# Altium PCB Chocolate_Vending_Machine_V2.2.PcbDoc
Units mm, origin at the board's own origin, x right, y up, seen from the top; angles counter-clockwise.
Board outline 80 x 72 mm, 2 copper layers (Top Layer, Bottom Layer); 22 components, 21 nets, 125 pads, 22 vias.
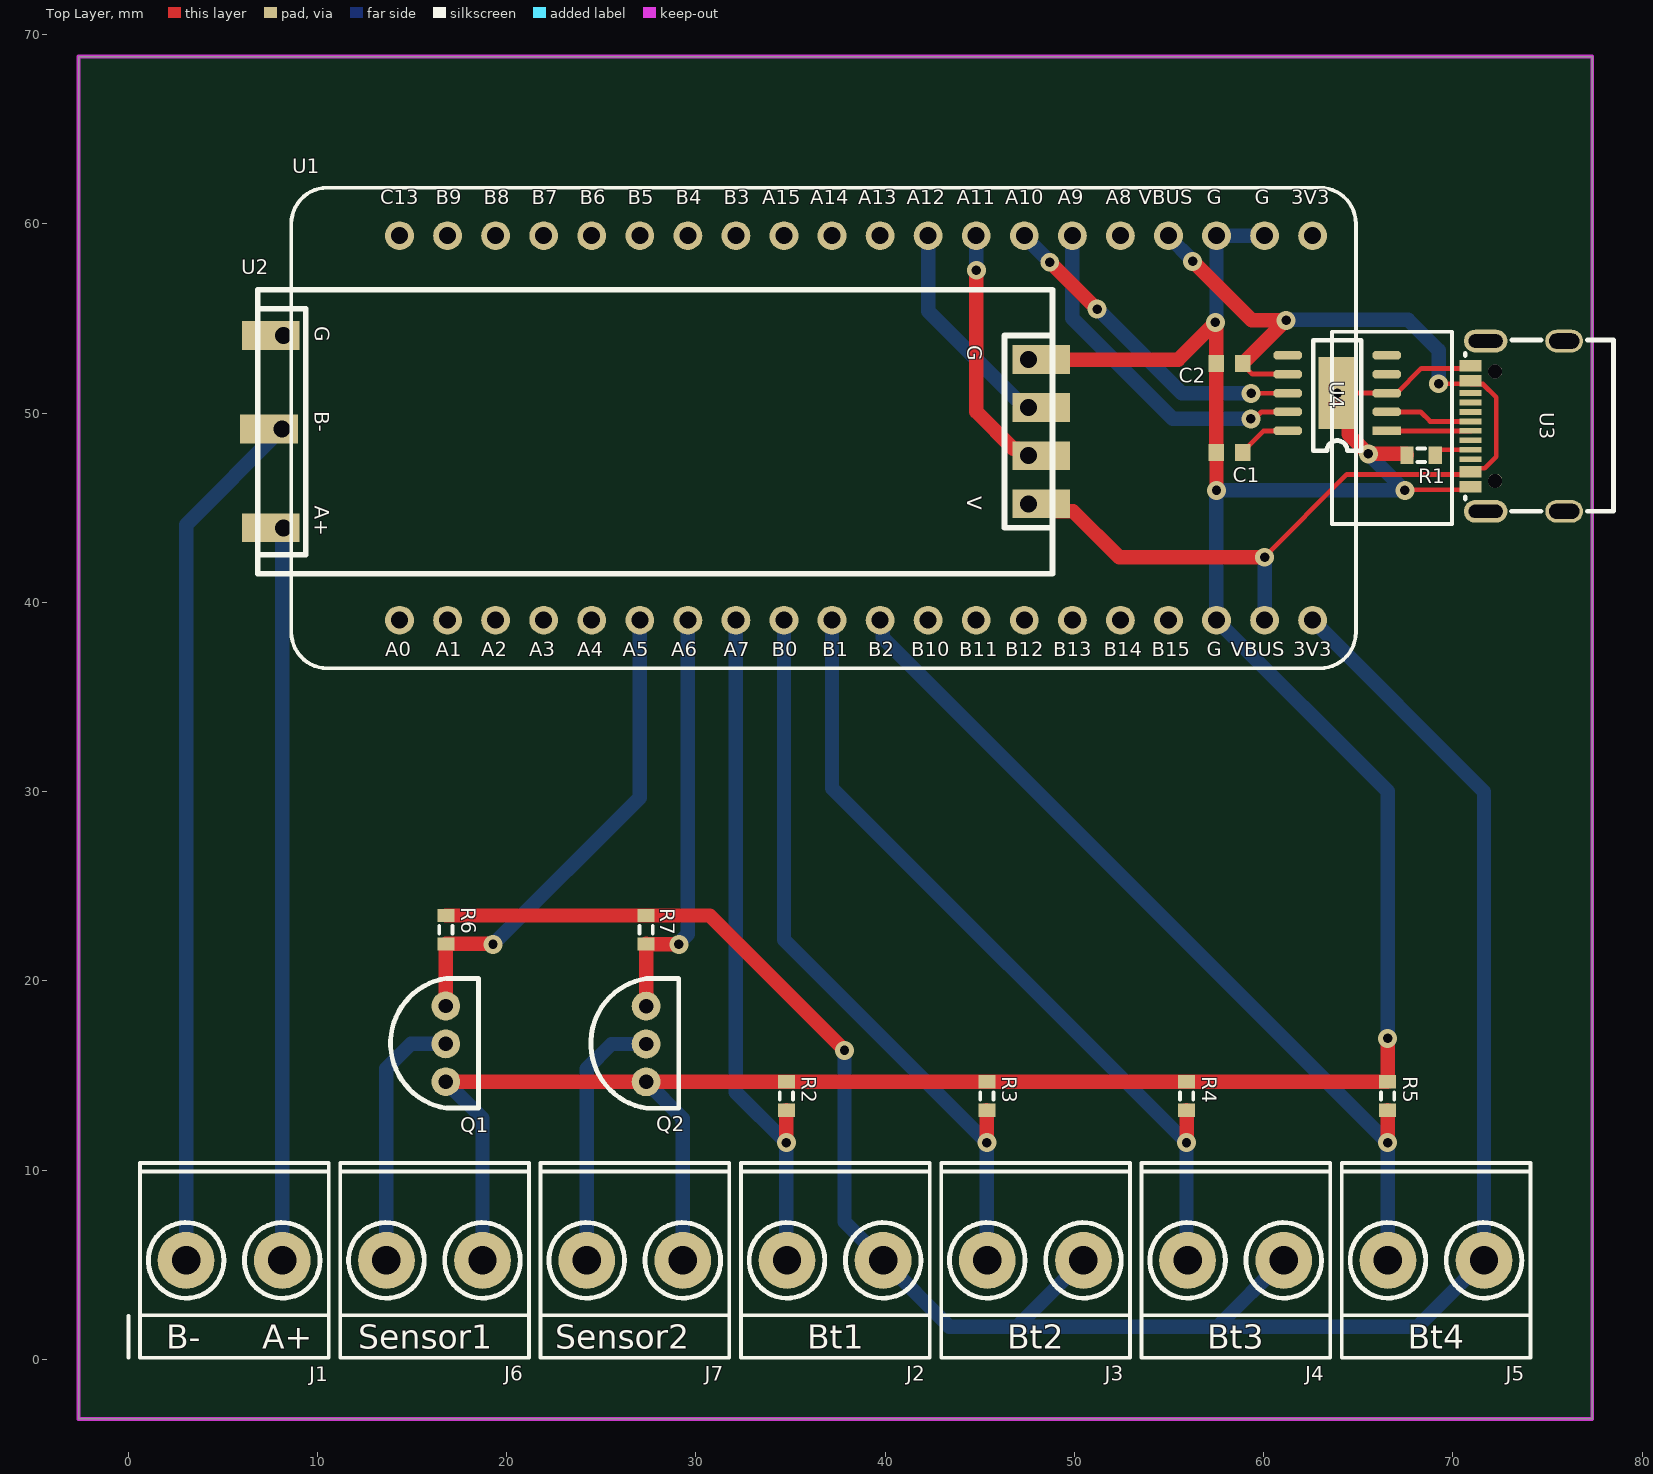
[diagram p0: Top Layer view]
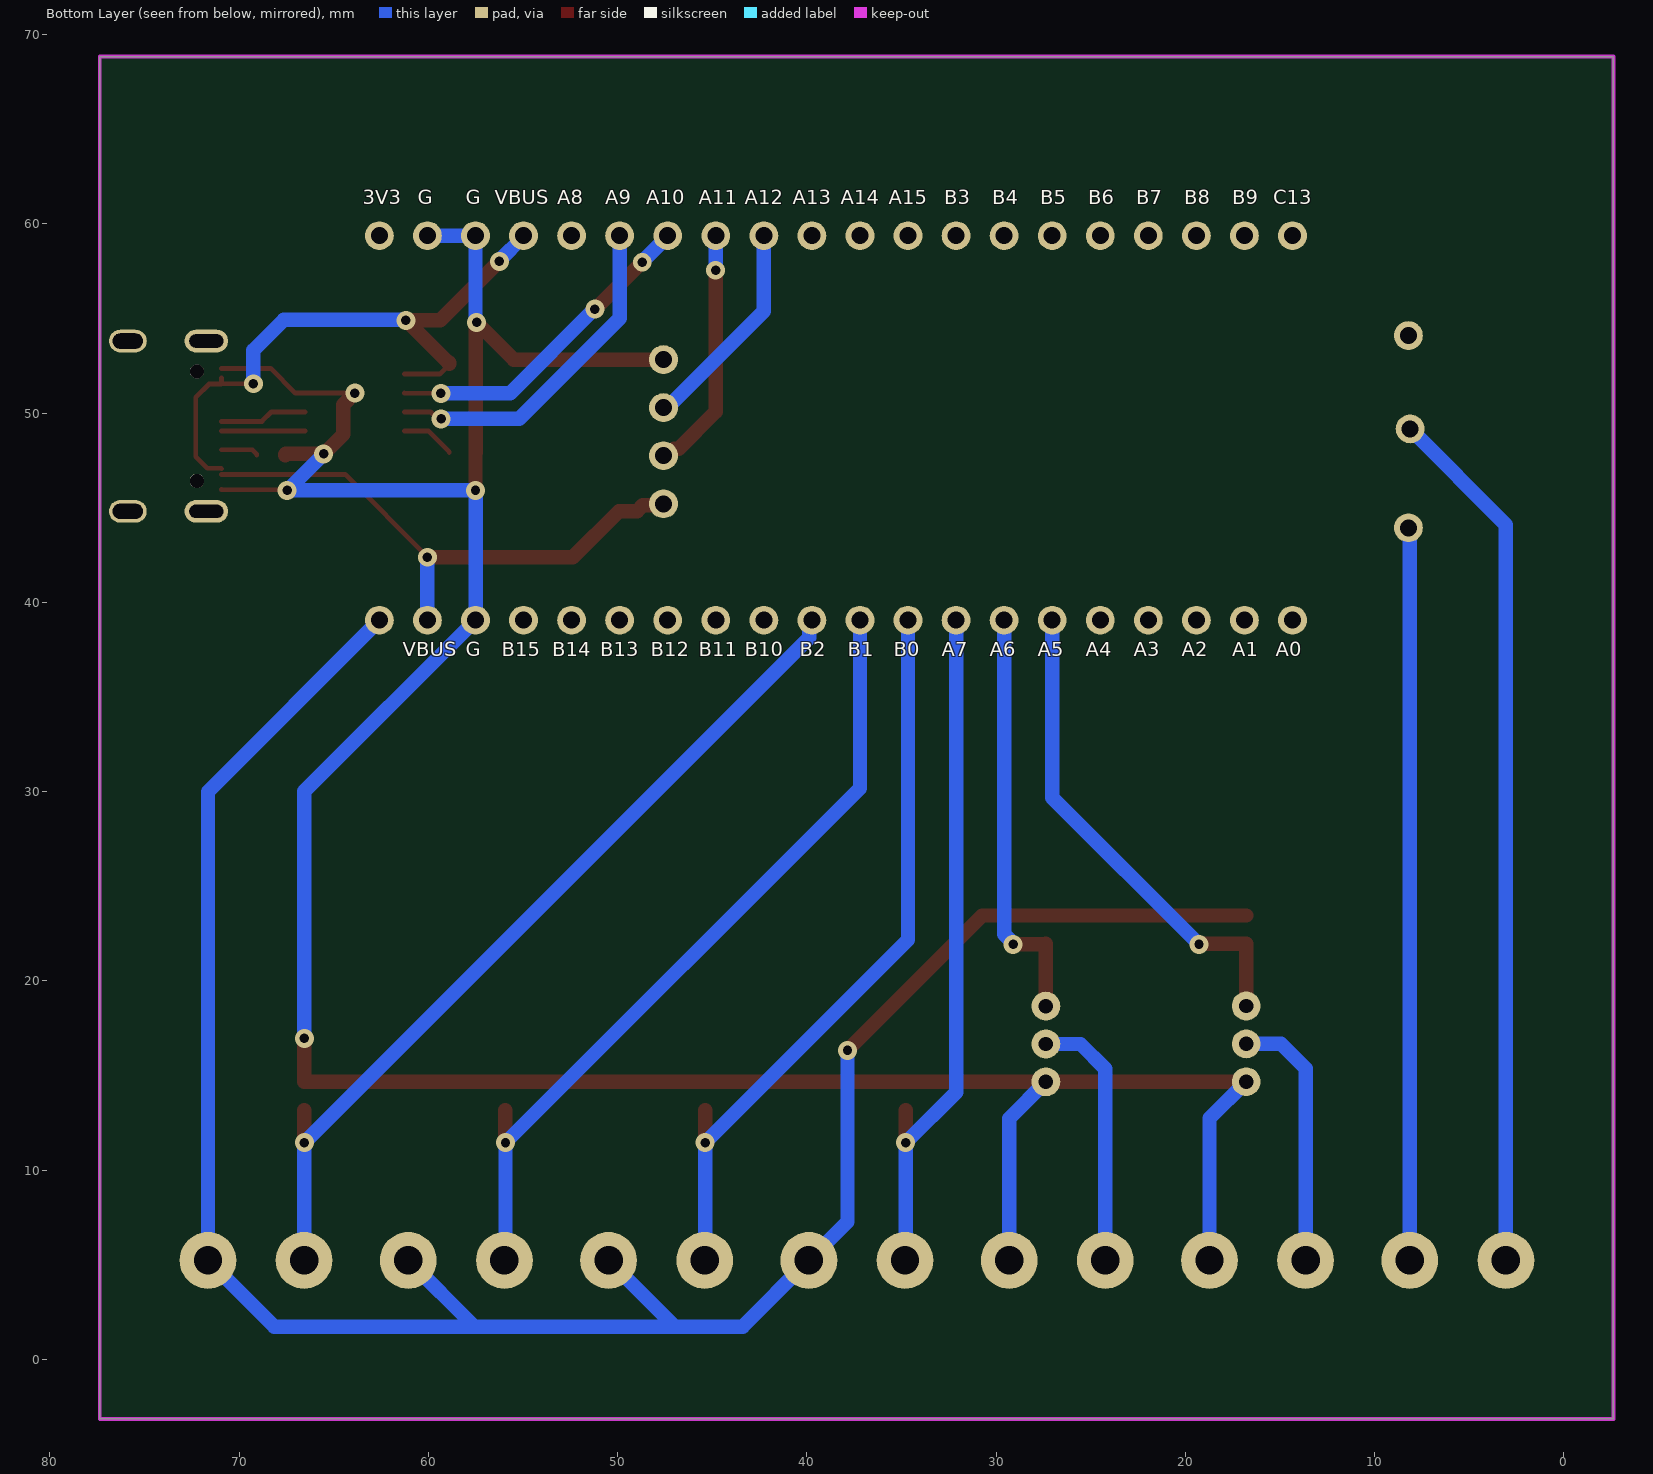
[diagram p1: Bottom Layer view, seen from below]

## Layer stack, top to bottom
Top Solder: solder mask 0.0102, Solder Resist, Dk 3.5
Top Layer: signal copper 0.0356
Dielectric 1: dielectric 0.32, FR-4, Dk 4.8
Bottom Layer: signal copper 0.0356
Bottom Solder: solder mask 0.0102, Solder Resist, Dk 3.5

## Board outline
77.375,68.841 77.375,-3.159 -2.625,-3.159 -2.625,68.841

## Design rules (kind name [scope] priority, off if disabled: settings)
Clearance [All] p1: gap=0.102 ignorepadtopadclearanceinfootprint=FALSE except(0: Arc-Hole Track-Hole SMDPad-Hole THPad-Hole Via-Hole Fill-Hole Poly-Hole Region-Hole Text-Hole)
ComponentClearance [All] p1 off: gap=0.254 collisioncheckmode=3 verticalgap=0.254 showdistances=FALSE
PolygonConnect [All] p1: connectstyle=Relief reliefconductorwidth=0.254 reliefentries=4 polygonreliefangle="90 Angle" airgapwidth=0.254
RoutingVias [All] p1: holewidth=0.5 width=1 viastyle="Through Hole" minholewidth=0.5 minwidth=1 maxholewidth=0.5 maxwidth=1
SolderMaskExpansion [All] p1: expansion=0.102 istentingtop=FALSE
Width [All] p1: maxlimit=0.762 minlimit=0.178 preferedwidth=0.254 minimp=50.000000 maximp=50.000000 favimp=50.000000
29 further rules are at their usual default settings.

## Components (designator, comment, footprint, x,y, rotation, side; value= is the part's Value field where it differs from the comment)
C1 "Cap Semi" 1608[0603] 58.2,47.914 r180 top value=0.1uF
C2 "Cap Semi" 1608[0603] 58.2,52.613 r0 top value=0.1uF
J1 "Terminal_Block" "terminal block" 3.055,5.223 r270 top
J2 "Terminal_Block" "terminal block" 34.812,5.223 r270 top
J3 "Terminal_Block" "terminal block" 45.398,5.223 r270 top
J4 "Terminal_Block" "terminal block" 55.984,5.223 r270 top
J5 "Terminal_Block" "terminal block" 66.57,5.223 r270 top
J6 "Terminal_Block" "terminal block" 13.641,5.223 r270 top
J7 "Terminal_Block" "terminal block" 24.226,5.223 r270 top
Q1 "S9013" S9013 16.782,16.67 r0 top
Q2 "S9013" S9013 27.368,16.663 r0 top
R1 "Res3" J1-0603 68.325,47.775 r0 top value=5.1K
R2 "Res3" J1-0603 34.779,13.91 r90 top value=1K
R3 "Res3" J1-0603 45.371,13.91 r90 top value=1K
R4 "Res3" J1-0603 55.937,13.91 r90 top value=1K
R5 "Res3" J1-0603 66.555,13.91 r90 top value=1K
R6 "Res3" J1-0603 16.78,22.7 r270 top value=1K
R7 "Res3" J1-0603 27.366,22.7 r270 top value=1K
U1 "STM32F411_TYPEC" STM32F411_TypeC 10.522,36.516 r0 top
U2 "UART_TO_485" UART_TO_RS485 7.008,56.531 r270 top
U3 "Type_C" Type_C_V2 74.379,49.489 r90 top
U4 "CH340K" CH340K_V1 63.889,51.061 r180 top

## Footprints (in the part's own frame and the unit in brackets; to place one, negate y for a bottom-side part, rotate by r counter-clockwise, add the part's x,y. Pads: shape width x height; smd on the part's side, far side on the other; paste and mask are expansions set on the pad)
1608[0603] [mm] "Chip Capacitor, Body 1.6x0.8mm, IPC High Density"
  rect 0.8x0.9 smd: 1(-0.7,0) 2(0.7,0)
  body extent -0.87,-0.48 0.87,0.48, height 1.3
CH340K_V1 [mm] "自己畫的"
  rect 2x3.8 smd: 0(0,0)
  rect 1.5x0.45 smd: 1(-2.616,2)
  oct 1.5x0.45 smd: 2(-2.616,1) 3(-2.616,0) 4(-2.616,-1) 5(-2.616,-2) 6(2.616,-2) 7(2.616,-1) 8(2.616,0) 9(2.616,1) 10(2.616,2)
  silkscreen extent -1.27,-2.79 1.27,3.05
J1-0603 [mm] "Chip Resistor, Body 1.6x0.8mm, IPC High Density"
  rect 0.7x0.9 smd: 1(-0.75,0) 2(0.75,0)
  silkscreen extent -0.2,-0.35 0.2,0.35, body extent -0.85,-0.48 0.85,0.48, height 0.9
S9013 [mil] "S9013_TO-92"
  round 60 hole 30: 0(-0.08,-78.87) 1(-0.08,-0.13) 2(-0.08,78.61)
  silkscreen extent -115,-134 68,136
STM32F411_TypeC [mil]
  round 60 hole 35.43: 1(2050,100) 2(1950,100) 3(1850,100) 4(1750,100) 5(1650,100) 6(1550,100) 7(1450,100) 8(1350,100) 9(1250,100) 10(1150,100) 11(1050,100) 12(950,100) 13(850,100) 14(750,100) 15(650,100) 16(550,100) 17(450,100) 18(350,100) 19(250,100) 20(150,100) 21(2050,900) 22(1950,900) 23(1850,900) 24(1750,900) 25(1650,900) 26(1550,900) 27(1450,900) 28(1350,900) 29(1250,900) 30(1150,900) 31(1050,900) 32(950,900) 33(850,900) 34(750,900) 35(650,900) 36(550,900) 37(450,900) 38(350,900) 39(250,900) 40(150,900)
  silkscreen extent -75,0 2340,1000, body extent -79,-4 2344,1004, height 50
"terminal block" [mm]
  round 3 hole 1.5 paste+0 mask+0.051: 1(0,5.08) 2(0,0)
  silkscreen extent -5.15,-2.44 5.15,7.54
Type_C_V2 [mm] "孟昌學長的"
  oval 1.2x2 hole 0.8 slot 1.6 at 90 deg: 0(-4.678,-1.506) 0(4.322,-1.506)
  oval 1.2x2.3 hole 0.7 slot 1.8 at 90 deg: 0(-4.678,2.644) 0(4.322,2.644)
  rect 0.3x1.15 smd: A1(-3.528,3.442) A4(-2.728,3.44) A5(-1.428,3.444) A6(-0.428,3.444) A7(0.072,3.442) A9(2.372,3.444) A12(3.172,3.444) B1(2.872,3.444) B4(2.072,3.444) B5(1.572,3.444) B6(0.572,3.444) B7(-0.928,3.442) B9(-2.428,3.44) B12(-3.228,3.442)
  rect 0.3x1.148 smd: A8(-1.928,3.444) B8(1.072,3.444)
  round 0.75 hole 0.75 unplated: ""(-3.068,2.144) ""(2.712,2.144)
  silkscreen extent -4.68,-4.11 4.38,3.72, body extent -4.67,-4.06 4.27,3.84, height 3.25
UART_TO_RS485 [mil]
  round 60 hole 35.43: 1(445.71,1597.13) 2(345.71,1597.13) 3(245.71,1597.13) 4(145.71,1597.13) 5(495.71,47.13) 6(289.8,43.58) 7(95.71,47.13)
  rect 60x120 smd: 1(445.71,1623.9) 2(345.71,1623.9) 3(245.71,1623.9) 4(145.71,1623.9) 5(495.71,20.35) 6(289.8,16.81) 7(95.71,20.35)
  silkscreen extent 0,-6 591,1647

## Part data
C1 C2: "Capacitor (Semiconductor SIM Model)", LatestRevisionDate=29-May-2009, LatestRevisionNote="IPC-7351 Footprint Added.", PackageDescription="Chip Capacitor", PackageReference=C1206, Published=8-Jun-2000, Publisher="Altium Limited"
J1 J2 J3 J4 J5 J6 J7: library part "Terminal Block"
R1 R2 R3 R4 R5 R6 R7: "Resistor", LatestRevisionDate=29-May-2009, LatestRevisionNote="IPC-7351 Footprint Added.", PackageDescription="Chip Resistor", PackageReference=J1-0603, Published=8-Jun-2000, Publisher="Altium Limited"

## Via types
v1: diameter 1, hole 0.5, Top Layer to Bottom Layer, 22 vias

## Nets (pads, with @x,y where several pads share a name; then routed paths per layer and width w, separated by ;. In a path a pad name is that pad's centre, name@x,y a point inside that pad or via, vN(x,y) a via of type N, cw(c..) or ccw(c..) an arc to the next point about the centre after c; other vN are vias at no path point)
3.3V: J2.1 J3.1 J4.1 J5.1 R6.1 R7.1 U1.1 | length 118.1
  Top Layer w0.762: R6.1 R7.1 30.725,23.45 v1(37.85,16.325)
  Bottom Layer w0.762: v1(37.85,16.325) 37.85,7.266 J2.1 43.391,1.725 46.98,1.725 ; J3.1 46.98,1.725 ; J4.1 57.566,1.725 ; U1.1 71.65,29.998 J5.1 68.152,1.725 57.566,1.725 ; 46.98,1.725 57.566,1.725
5V: C2.2 U1.2 U1.24 U2.1 U3.A4 U3.A9 U3.B4 U3.B9 U4.7 | length 62.3
  Top Layer w0.254: C2.2 58.9,52.563 59.402,52.061 U4.7 ; v1@60.027,42.384 64.404,46.761 U3.A4 ; v1(69.247,51.553) 69.251,51.557 70.932,51.557 U3.B4 ; U3.A9 U3.B4 ; U3.B9 70.963,47.084 71.677,47.084 72.295,47.702 72.295,50.838 71.595,51.538 70.959,51.538 U3.B4
  Top Layer w0.762: U2.1@47.911,45.203 47.911,45.145 47.927,45.129 48.665,45.129 48.972,44.822 49.928,44.822 52.366,42.384 60.027,42.384 v1(60.052,42.384) ; v1(56.25,58.025) 59.374,54.901 v1(61.187,54.901) 58.969,52.682 58.919,52.682 58.9,52.663 C2.2
  Bottom Layer w0.762: U1.24 54.972,59.34 56.25,58.062 v1(56.25,58.025) ; U1.2 v1(60.052,42.384) ; v1(61.187,54.901) 61.211,54.925 67.653,54.925 69.247,53.331 v1(69.247,51.553)
CH340K_Rx: U1.26 U4.9 | length 18.1
  Top Layer w0.254: v1(59.325,49.7) 59.527,49.7 59.888,50.061 U4.9
  Bottom Layer w0.762: U1.26 49.892,55.008 55.2,49.7 v1(59.325,49.7)
CH340K_Tx: U1.27 U4.8 | length 17.4
  Top Layer w0.254: v1(59.341,51.045) 59.349,51.053 61.265,51.053 U4.8
  Top Layer w0.762: v1(48.7,57.975) 48.712,57.975 51.187,55.5 v1(51.2,55.5)
  Bottom Layer w0.762: U1.27 47.352,59.35 48.7,58.002 v1(48.7,57.975) ; v1(51.2,55.5) 51.228,55.5 55.683,51.045 v1(59.341,51.045)
GND: C1.2 C2.1 J6.1 J7.1 Q1.0 Q2.0 R1.1 R2.2 R3.2 R4.2 R5.2 U1.3 U1.22 U1.23 U2.4 U3.A1 U3.A12 U3.B1 U3.B12 U4.0 U4.3 | length 161.5
  Top Layer w0.254: v1(63.889,51.061) U4.3 67.03,51.061 68.33,52.361 U3.B1 ; v1(67.469,45.914) 67.505,45.95 70.926,45.95 U3.A1
  Top Layer w0.762: Q1.0@16.581,14.66 R2.2@34.71,14.66 ; R2.2 R3.2 R4.2 R5.2 ; U2.4@47.911,52.823 55.48,52.823 v1@57.45,54.793 ; v1(57.45,54.8) v1@57.45,54.793 ; v1@57.525,45.975 57.512,45.988 57.512,47.902 C1.2 C2.1 57.506,52.62 57.506,54.68 57.45,54.736 v1@57.45,54.793 ; v1(63.889,51.061) 64.508,50.442 64.508,48.875 v1(65.539,47.844) 67.544,47.844 67.575,47.813 R1.1 ; R5.2 v1(66.555,16.959)
  Bottom Layer w0.762: Q1.0 18.721,12.726 J6.1 ; Q2.0 29.306,12.72 J7.1 ; v1(57.45,54.8) 57.45,54.864 57.512,54.927 U1.23 U1.22 ; U1.3@57.506,39.063 v1@57.506,45.908 ; U1.3 66.555,30.013 v1(66.555,16.959) ; v1(57.512,45.914) v1(67.469,45.914) v1(65.539,47.844)
Infrared_Input1: Q1.2 R6.2 U1.15 | length 26.1
  Top Layer w0.762: Q1.2 R6.2 19.25,21.95 v1(19.275,21.925)
  Bottom Layer w0.762: v1(19.275,21.925) 27.032,29.682 U1.15
Infrared_Input2: Q2.2 R7.2 U1.14 | length 22.4
  Top Layer w0.762: Q2.2 R7.2 27.378,21.937 29.087,21.937 v1(29.1,21.925)
  Bottom Layer w0.762: v1(29.1,21.925) 29.1,21.989 29.572,22.462 U1.14
Infrared_Sensor1: J6.2 Q1.1 | length 13.8
  Bottom Layer w0.762: J6.2 13.641,15.366 14.942,16.667 Q1.1
Infrared_Sensor2: J7.2 Q2.1 | length 13.8
  Bottom Layer w0.762: J7.2 24.226,15.351 25.535,16.66 Q2.1
NetC1_1: C1.1 U4.10 | length 2.9
  Top Layer w0.254: C1.1 58.9,47.964 59.996,49.061 U4.10
NetR1_2: R1.2 U3.A5 | length 2
  Top Layer w0.254: R1.2 69.075,47.838 69.298,48.061 U3.A5
PlayBt1_Input: J2.2 R2.1 U1.13 | length 36.6
  Top Layer w0.762: v1(34.775,11.45) 34.777,11.452 34.777,13.158 R2.1
  Bottom Layer w0.762: U1.13 32.112,14.113 v1(34.775,11.45) J2.2@34.775,5.261
PlayBt2_Input: J3.2 R3.1 U1.12 | length 40
  Top Layer w0.762: R3.1 45.373,13.158 45.373,11.452 v1(45.375,11.45)
  Bottom Layer w0.762: U1.12 34.652,22.173 v1(45.375,11.45) J3.2@45.375,5.247
PlayBt3_Input: J4.2 R4.1 U1.11 | length 43.3
  Top Layer w0.762: v1(55.925,11.45) 55.931,11.456 55.931,13.154 R4.1
  Bottom Layer w0.762: U1.11 37.192,30.183 v1(55.925,11.45) 55.925,5.283 J4.2
PlayBt4_Input: J5.2 R5.1 U1.10 | length 46.6
  Top Layer w0.762: v1(66.55,11.45) 66.552,11.452 66.552,13.158 R5.1
  Bottom Layer w0.762: U1.10 39.878,38.91 39.878,38.122 v1@66.504,11.496 ; v1(66.55,11.45) 66.56,11.44 66.56,5.233 J5.2
RS485_A+: J1.1 U2.5 | length 38.7
  Bottom Layer w0.762: J1.1 8.135,43.87 U2.5@8.205,43.94
RS485_B-: J1.2 U2.6 | length 46
  Bottom Layer w0.762: J1.2 3.055,44.11 U2.6@8.115,49.17
RS485_Rx: U1.29 U2.3 | length 11.4
  Bottom Layer w0.762: U1.29 42.272,55.387 47.369,50.29 U2.3@47.575,50.29
RS485_Tx: U1.28 U2.2 | length 13.2
  Top Layer w0.762: v1(44.825,57.55) 44.825,50.075 46.777,48.123 46.996,48.123 47.369,47.75 U2.2@47.575,47.75 ; U2.2@47.705,47.743 U2.2@47.911,47.743
  Bottom Layer w0.762: U1.28 44.819,59.37 44.819,57.556 v1(44.825,57.55)
UD+: U3.A6 U4.1 | length 4.4
  Top Layer w0.254: U4.1 U3.A6
UD-: U3.A7 U4.2 | length 4.6
  Top Layer w0.254: U4.2 68.301,50.061 68.801,49.561 U3.A7
pads on no net: U1.4 U1.5 U1.6 U1.7 U1.8 U1.9 U1.16 U1.17 U1.18 U1.19 U1.20 U1.21 U1.25 U1.30 U1.31 U1.32 U1.33 U1.34 U1.35 U1.36 U1.37 U1.38 U1.39 U1.40 U2.7 U3. U3.0 U3.A8 U3.B5 U3.B6 U3.B7 U3.B8 U4.4 U4.5 U4.6

## Keep-outs
Keep-Out Layer:
  the board outline again, w0.2

## Silkscreen, mask and mechanical layers (free items; w line width, h text height)
Top Overlay:
  lines w0.2: 0.016,0.073 0.016,2.277
  text "B-" at 1.997,0.54 h1.27
  text "A+" at 7.077,0.54 h1.27
  text "Sensor1" at 12.153,0.54 h1.27
  text "Sensor2" at 22.553,0.54 h1.27
  text "Bt1" at 35.878,0.54 h1.27
  text "Bt2" at 46.453,0.54 h1.27
  text "Bt3" at 57.028,0.54 h1.27
  text "Bt4" at 67.628,0.54 h1.27
Mechanical 1:
  lines w0.2: -5.625,-0.175 80.375,-0.175 ; -4.625,65.825 81.375,65.825 ; 0.375,-6.175 0.375,71.825 ; 74.375,-6.175 74.375,71.825
  lines w0.254: -6.064,-1.635 -5.557,-3.159 ; -6.036,67.288 -5.528,68.812 ; -5.811,-3.159 -5.303,-3.159 ; -5.782,68.812 -5.274,68.812 ; -5.545,25.057 -5.557,-3.159 ; -5.539,40.597 -5.528,68.812 ; -5.048,-1.635 -5.557,-3.159 ; -5.02,67.288 -5.528,68.812 ; -2.635,-4.937 -2.635,-4.429 ; -1.111,-5.191 -2.635,-4.683 ; -1.111,-4.175 -2.635,-4.683 ; 30.235,-4.683 -2.635,-4.683 ; 44.505,-4.683 77.375,-4.683 ; 75.851,-5.191 77.375,-4.683 ; 75.851,-4.175 77.375,-4.683 ; 77.375,-4.937 77.375,-4.429
  text "71.971 (mm)" at -4.631,25.31 h1.52 r89.98
  text "80.01 (mm)" at 30.489,-5.597 h1.52

## Text inside footprints (layer, text, board x,y; h text height)
U1: Top Overlay "B9" at 16.237,60.785 h1.3; Top Overlay "C13" at 13.316,60.773 h1.3; Top Overlay "B8" at 18.777,60.785 h1.3; Top Overlay "B7" at 21.317,60.788 h1.3; Top Overlay "B3" at 31.477,60.785 h1.3; Top Overlay "B4" at 28.937,60.788 h1.3; Top Overlay "B5" at 26.397,60.788 h1.3; Top Overlay "B6" at 23.857,60.785 h1.3; Top Overlay "A12" at 41.129,60.785 h1.3; Top Overlay "A13" at 38.589,60.785 h1.3; Top Overlay "A14" at 36.049,60.785 h1.3; Top Overlay "A15" at 33.509,60.785 h1.3; Top Overlay "A8" at 51.67,60.785 h1.3; Top Overlay "A9" at 49.13,60.785 h1.3; Top Overlay "A10" at 46.336,60.785 h1.3; Top Overlay "A11" at 43.796,60.785 h1.3; Top Overlay "3V3" at 61.449,60.785 h1.3; Top Overlay "G" at 59.544,60.773 h1.3; Top Overlay "G" at 57.004,60.773 h1.3; Top Overlay "VBUS" at 53.407,60.788 h1.3; Top Overlay "B15" at 54.083,36.896 h1.3; Top Overlay "G" at 57.004,36.896 h1.3; Top Overlay "VBUS" at 58.274,36.882 h1.3; Top Overlay "3V3" at 61.576,36.897 h1.3; Top Overlay "B11" at 43.923,36.882 h1.3; Top Overlay "B12" at 46.336,36.882 h1.3; Top Overlay "B13" at 48.876,36.897 h1.3; Top Overlay "B14" at 51.543,36.882 h1.3; Top Overlay "B0" at 34.017,36.896 h1.3; Top Overlay "B1" at 36.684,36.882 h1.3; Top Overlay "B2" at 39.097,36.882 h1.3; Top Overlay "B10" at 41.383,36.896 h1.3; Top Overlay "A4" at 23.73,36.882 h1.3; Top Overlay "A5" at 26.143,36.896 h1.3; Top Overlay "A6" at 28.683,36.896 h1.3; Top Overlay "A7" at 31.477,36.882 h1.3; Top Overlay "A3" at 21.19,36.897 h1.3; Top Overlay "A2" at 18.65,36.882 h1.3; Top Overlay "A1" at 16.237,36.882 h1.3; Top Overlay "A0" at 13.57,36.896 h1.3; Bottom Overlay "B14" at 53.448,36.882 h1.3; Bottom Overlay "B10" at 43.288,36.896 h1.3; Bottom Overlay "B13" at 50.908,36.897 h1.3; Bottom Overlay "A2" at 20.174,36.882 h1.3; Bottom Overlay "A5" at 27.794,36.896 h1.3; Bottom Overlay "VBUS" at 61.363,36.882 h1.3; Bottom Overlay "G" at 58.02,36.896 h1.3; Bottom Overlay "B15" at 56.115,36.896 h1.3; Bottom Overlay "B12" at 48.241,36.882 h1.3; Bottom Overlay "B11" at 45.701,36.882 h1.3; Bottom Overlay "B2" at 40.367,36.882 h1.3; Bottom Overlay "B1" at 37.827,36.882 h1.3; Bottom Overlay "A7" at 32.874,36.882 h1.3; Bottom Overlay "A6" at 30.334,36.896 h1.3; Bottom Overlay "A3" at 22.714,36.897 h1.3; Bottom Overlay "A1" at 17.507,36.882 h1.3; Bottom Overlay "B0" at 35.414,36.896 h1.3; Bottom Overlay "A4" at 25.254,36.882 h1.3; Bottom Overlay "A0" at 15.221,36.896 h1.3; Bottom Overlay "B9" at 17.507,60.785 h1.3; Bottom Overlay "B5" at 27.667,60.788 h1.3; Bottom Overlay "A14" at 38.208,60.785 h1.3; Bottom Overlay "C13" at 15.348,60.773 h1.3; Bottom Overlay "B8" at 20.047,60.785 h1.3; Bottom Overlay "B7" at 22.587,60.788 h1.3; Bottom Overlay "B3" at 32.747,60.785 h1.3; Bottom Overlay "B4" at 30.207,60.788 h1.3; Bottom Overlay "A13" at 40.748,60.785 h1.3; Bottom Overlay "A15" at 35.668,60.785 h1.3; Bottom Overlay "A12" at 43.288,60.785 h1.3; Bottom Overlay "A10" at 48.495,60.785 h1.3; Bottom Overlay "A11" at 45.701,60.785 h1.3; Bottom Overlay "A8" at 53.194,60.785 h1.3; Bottom Overlay "VBUS" at 56.496,60.788 h1.3; Bottom Overlay "3V3" at 63.481,60.785 h1.3; Bottom Overlay "G" at 60.56,60.773 h1.3; Bottom Overlay "B6" at 25.127,60.785 h1.3; Bottom Overlay "A9" at 50.654,60.785 h1.3; Bottom Overlay "G" at 58.02,60.773 h1.3
U2: Top Overlay "G" at 44.345,53.6 h0.76 r270; Top Overlay "V" at 44.345,45.6 h0.76 r270; Top Overlay "G" at 9.845,54.6 h0.76 r270; Top Overlay "B-" at 9.845,50.1 h0.76 r270; Top Overlay "A+" at 9.845,45.1 h0.76 r270